# EAGLE board RadarAltimeter (EAGLE 6.3)
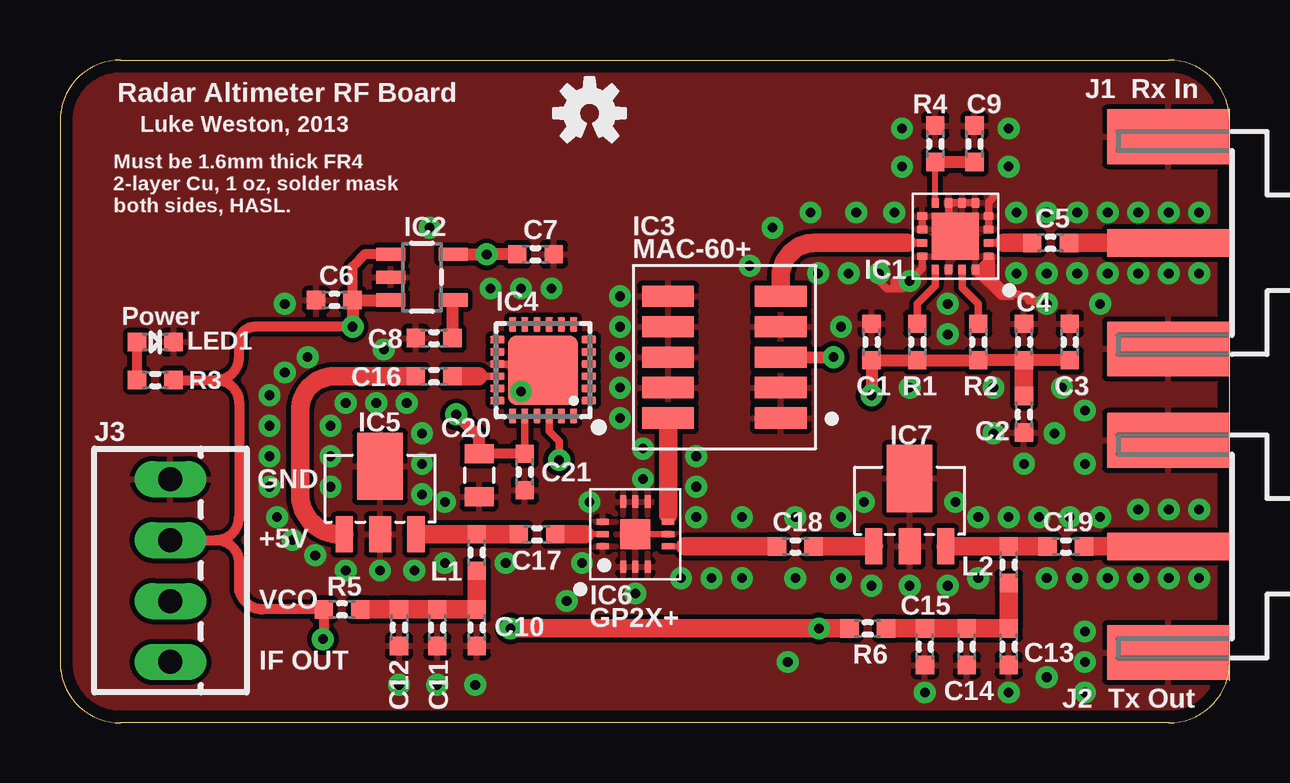
[diagram p0: board, top side]
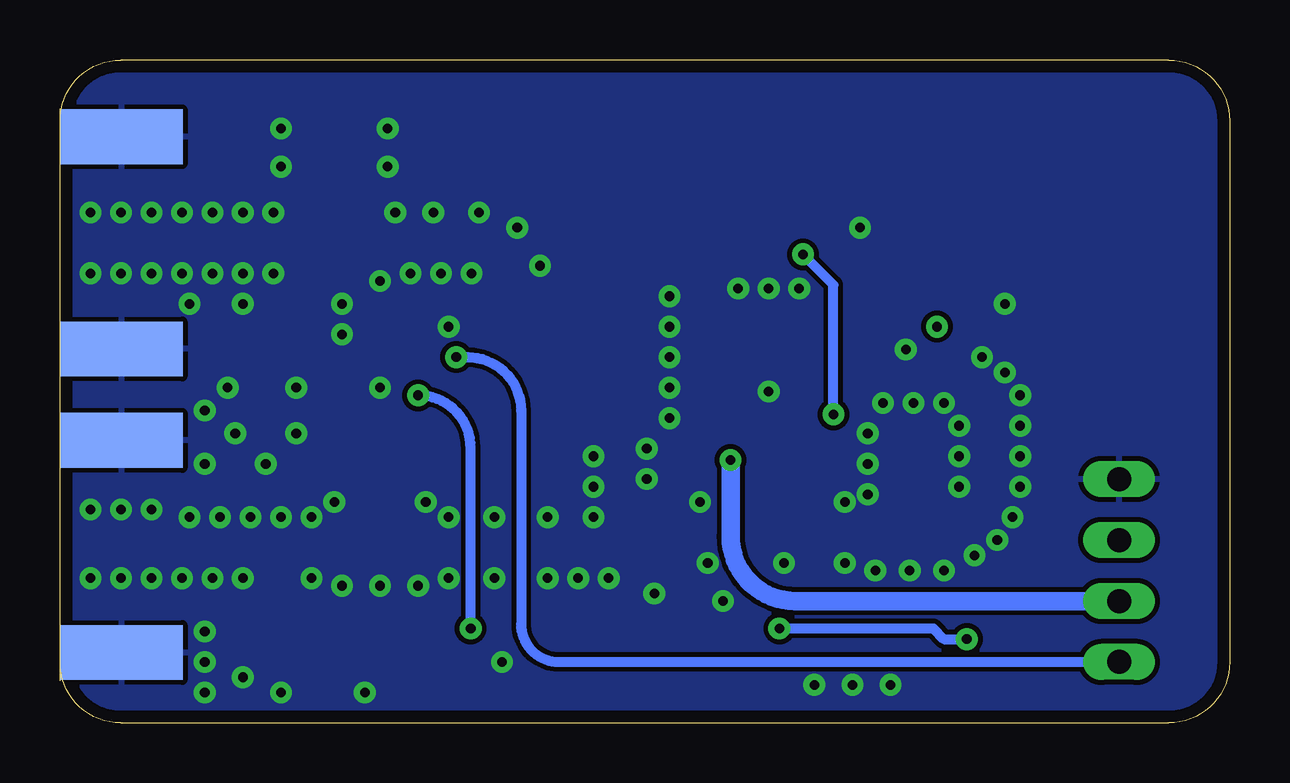
[diagram p1: board, bottom side, seen from below]

Size 48.74 x 27.62 mm. Coordinates in mm from the lower left corner, seen from the top.
Outline: 2.54,27.62 46.2,27.62 arc-90 48.74,25.08 48.74,2.54 arc-90 46.2,0 2.54,0 arc-90 0,2.54 0,25.08 arc-90 2.54,27.62
Copper layers (1*16): Top 0.035mm / dielectric 1.5mm / Bottom 0.035mm
Design rules "PCBCart-Standard *": minimum track width 8mil, minimum drill 0.4mm, track to track 8mil, track to pad 8mil, pad to pad 8mil, via to via 8mil, smd to smd 8mil, copper to edge 20mil, drill to drill 8mil, minimum pad ring 8mil, minimum via ring 10mil, stop-mask expansion 3mil, vias tented up to drill 16mil, thermal gap 8mil
Net classes: 1 vcc: width 0.254 mm

## Footprints (pad centres in the part's own frame; a part is rotated, then mirrored left to right if it is on the bottom)
0603 = smd 0.762 x 0.762: 1 -0.762,0; 2 0.762,0
0805 = smd 0.8 x 1.2: 1 -0.9,0; 2 0.9,0
16-QFN = smd 0.305 x 0.406: P$1 -0.838,-1.384; P$2 -0.279,-1.384; P$3 0.279,-1.384; P$4 0.838,-1.384; P$9 0.838,1.384; P$10 0.279,1.384; P$11 -0.279,1.384; P$12 -0.838,1.384 | smd 0.406 x 0.305: P$5 1.384,-0.838; P$6 1.384,-0.279; P$7 1.384,0.279; P$8 1.384,0.838; P$13 -1.384,0.838; P$14 -1.384,0.279; P$15 -1.384,-0.279; P$16 -1.384,-0.838 | smd 1.956 x 1.956: PAD 0,0
SOT23-5 = smd 0.55 x 1.2: 1 -0.95,-1.3; 2 0,-1.3; 3 0.95,-1.3; 4 0.95,1.3; 5 -0.95,1.3
DZ1650 = smd 0.889 x 2.159: P$1 -2.54,-2.349; P$2 -1.27,-2.349; P$3 0,-2.349; P$4 1.27,-2.349; P$5 2.54,-2.349; P$6 2.54,2.349; P$7 1.27,2.349; P$8 0,2.349; P$9 -1.27,2.349; P$10 -2.54,2.349
QFN24 = smd 0.6 x 0.3: 1 -1.905,1.27; 2 -1.905,0.762; 3 -1.905,0.254; 4 -1.905,-0.254; 5 -1.905,-0.762; 6 -1.905,-1.27; 13 1.905,-1.27; 14 1.905,-0.762; 15 1.905,-0.254; 16 1.905,0.254; 17 1.905,0.762; 18 1.905,1.27 | smd 0.3 x 0.6: 7 -1.27,-1.905; 8 -0.762,-1.905; 9 -0.254,-1.905; 10 0.254,-1.905; 11 0.762,-1.905; 12 1.27,-1.905; 19 1.27,1.905; 20 0.762,1.905; 21 0.254,1.905; 22 -0.254,1.905; 23 -0.762,1.905; 24 -1.27,1.905 | smd 2.9 x 2.9: EXP 0,0
DF782 = smd 0.711 x 1.499: 1 -1.499,0; 3 1.499,0 | smd 0.914 x 1.499: 2 0,0 | smd 1.905 x 2.794: 4 0,2.832
QFN12 = smd 0.51 x 0.25: P$1 -1.36,-0.51; P$2 -1.36,0; P$3 -1.36,0.51; P$7 1.36,0.51; P$8 1.36,0; P$9 1.36,-0.51 | smd 0.25 x 0.51: P$4 -0.51,1.36; P$5 0,1.36; P$6 0.51,1.36; P$10 0.51,-1.36; P$11 0,-1.36; P$12 -0.51,-1.36 | smd 1.24 x 1.24: PAD 0,0
J502-ND-142-0701-881/886 = smd 5.08 x 1.143: 1 2.565,0 | smd 5.08 x 2.286: G@1 2.565,4.42; G@2 2.565,-4.42 | smd 5.08 x 2.286 bottom: G@3 2.565,4.42; G@4 2.565,-4.42
22-23-2041 = drill 1 long: 1 -3.81,0; 2 -1.27,0; 3 1.27,0; 4 3.81,0
LED-0603 = smd 0.762 x 0.762: A -0.762,0; C 0.762,0

## Placement (x,y rotation side)
C1  1nF  [0603]  33.81,15.88 270 top
C2  100pF  [0603]  40.16,12.86 90 top
C3  100pF  [0603]  42.07,15.88 270 top
C4  1nF  [0603]  40.16,15.88 270 top
C5  68pF  [0603]  41.27,20 180 top
C6  2.2µF  [0603]  11.43,17.62 180 top
C7  2.2µF  [0603]  19.81,19.53 0 top
C8  470pF  [0603]  15.59,16.03 0 top
C9  10nF  [0603]  38.1,24.13 270 top
C10  22pF  [0603]  17.37,3.97 90 top
C11  1nF  [0603]  15.72,3.97 90 top
C12  1µF  [0603]  14.13,3.97 90 top
C13  22pF  [0603]  39.53,3.18 90 top
C14  1nF  [0603]  37.78,3.18 90 top
C15  1µF  [0603]  36.04,3.18 90 top
C16  68pF  [0603]  15.59,14.45 180 top
C17  68pF  [0603]  19.88,7.86 0 top
C18  68pF  [0603]  30.64,7.35 0 top
C19  68pF  [0603]  41.91,7.35 0 top
C20  4.7µF  [0805]  17.46,10.32 270 top
C21  10nF  [0603]  19.37,10.46 270 top
IC1  HMC717LP3  [16-QFN]  37.31,20.28 90 top
IC2  MIC5219  [SOT23-5]  15.08,18.57 270 top
IC3  MAC-60+  [DZ1650]  27.69,15.24 90 top
IC4  HMC431LP4  [QFN24]  20.13,14.7 180 top
IC5  GALI-84+  [DF782]  13.34,7.86 0 top
IC6  GP2X+  [QFN12]  23.97,7.86 0 top
IC7  GALI-84+  [DF782]  35.4,7.35 0 top
J1  Rx  [J502-ND-142-0701-881/886]  48.74,20 180 top
J2  Tx  [J502-ND-142-0701-881/886]  48.74,7.35 180 top
J3  Interface  [22-23-2041]  4.6,6.35 270 top
L1  22nH  [0603]  17.37,7.1 90 top
L2  22nH  [0603]  39.53,6.59 90 top
LED1  Power  [LED-0603]  3.97,15.88 0 top
R1  0Ω  [0603]  35.72,15.88 270 top
R2  0Ω  [0603]  38.26,15.88 270 top
R3  1kΩ  [0603]  3.97,14.29 0 top
R4  2.0kΩ  [0603]  36.47,24.13 270 top
R5  0Ω  [0603]  11.75,4.73 180 top
R6  0Ω  [0603]  33.65,3.94 180 top
SY  OSHW-LOGOS  [OSHW-LOGO-S]  22.07,25.4 0 top

## Library data of the parts
C1-C19 C21 R1-R6 = freetronics-master-v1; PACKAGE: 0603
C20 = freetronics-master-v1; PACKAGE: 0805; VOLTAGE: 6.3V
IC1 = freetronics-luke; PACKAGE: 16-QFN
IC2 = SparkFun; PACKAGE: SOT23-5
IC3 IC6 = freetronics-luke
IC4 = microwave; OC_FARNELL: unknown; OC_NEWARK: unknown; PACKAGE: 24-QFN
IC5 IC7 = minickts; PACKAGE: SOT-89
J1 J2 = con-coax; ID: CONSMA003.031; MF: JOHNSON COMPONENTS; MPN: 142-0701-881; OC_FARNELL: 1608603; OC_NEWARK: 08B906
J3 = con-molex; MF: MOLEX; MPN: 22-23-2041; OC_FARNELL: 1462920; OC_NEWARK: 38C0355
L1 L2 = freetronics-master-v1; ID: HK160822NJ-T; PACKAGE: 0603
LED1 = freetronics-master-v1; COLOR: Jade; PACKAGE: 0603
SY = SparkFun

## Nets
+3.0V: C7.1 C20.1 C21.1 IC2.5 IC4.20
+5V: C1.2 C2.2 C3.2 C4.2 C6.1 IC2.1 IC2.3 J3.2 R1.2 R2.2 R3.2 R5.2 R6.2
GND: C1.1 C2.1 C3.1 C4.1 C6.2 C7.2 C8.1 C9.1 C10.1 C11.1 C12.1 C13.1 C14.1 C15.1 C20.2 C21.2 IC1.P$1 IC1.P$3 IC1.P$4 IC1.P$5 IC1.P$6 IC1.P$7 IC1.P$9 IC1.P$10 IC1.P$12 IC1.P$14 IC1.P$16 IC1.PAD IC2.2 IC3.P$1 IC3.P$2 IC3.P$4 IC3.P$6 IC3.P$7 IC3.P$8 IC3.P$9 IC4.15 IC4.EXP IC5.2 IC5.4 IC6.P$1 IC6.P$3 IC6.P$4 IC6.P$5 IC6.P$6 IC6.P$8 IC6.P$10 IC6.P$11 IC6.P$12 IC6.PAD IC7.2 IC7.4 J1.G@1 J1.G@2 J1.G@3 J1.G@4 J2.G@1 J2.G@2 J2.G@3 J2.G@4 J3.1 LED1.C R4.1
N$1: C16.2 IC5.1
N$2: C17.1 IC5.3 L1.2
N$3: C10.2 C11.2 C12.2 L1.1 R5.1
N$4: C16.1 IC4.16
N$5: C17.2 IC6.P$2
N$6: IC4.22 J3.3
N$7: C18.2 IC7.1
N$8: C19.1 IC7.3 L2.2
N$9: C13.2 C14.2 C15.2 L2.1 R6.1
N$10: C19.2 J2.1
N$11: C18.1 IC6.P$9
N$12: IC3.P$10 IC6.P$7
N$13: C8.2 IC2.4
N$14: IC3.P$3 J3.4
N$15: C5.2 IC1.P$2
N$16: C5.1 J1.1
N$17: IC1.P$11 IC3.P$5
N$18: C9.2 IC1.P$8 R4.2
N$19: IC1.P$13 R1.1
N$20: IC1.P$15 R2.1
N$21: LED1.A R3.1

## Tracks (layer width: path | path; a pad name or v marks a point on that pad's centre or on a via)
+3.0V  (via drill 0.4)
  Top 0.254: C21.1 arc90 C21.1
  Top 0.305: IC2.5 | IC4.20 C21.1
  Top 0.406: C21.1 C20.1 arc90 C20.1
  Top 0.508: IC2.5 v17.78,19.53 C7.1 | C20.1 17.47,11.9 v16.51,12.86
  Bottom 0.406: v16.51,12.86 16.51,18.26 v17.78,19.53
+5V  (via drill 0.4)
  Top 0.406: IC2.1 12.7,19.52 12.19,19.02 C6.1 | 13.5,17.62 IC2.3 | v10.95,3.49 arc90 10.99,3.52 R5.2 8.45,4.73 arc-90 7.46,5.72 7.46,6.67 arc90 6.51,7.62 | J3.2 6.51,7.62 | 6.51,7.62 arc90 7.46,8.57 7.46,13.33 arc90 6.51,14.29 | R3.2 6.51,14.29 | 6.51,14.29 arc90 7.46,15.24 7.46,15.88 arc-90 8.1,16.51 v12.19,16.51
  Top 0.508: C3.2 C4.2 R2.2 R1.2 C1.2 v33.81,13.65 | IC2.3 C6.1 v12.19,16.51
  Top 0.762: C4.2 C2.2 | R6.2 v31.62,3.94 v18.76,3.94
  Bottom 0.406: v18.76,3.94 12.35,3.94 11.91,3.49 v10.95,3.49 | v31.62,3.94 31.62,11.46 arc-90 v33.81,13.65
GND  (via drill 0.4)
  Top 0.254: 38.64,18.61 38.83,18.61 38.83,19.43 38.7,19.43 IC1.P$1 | 38.64,18.8 38.64,19.24 | 38.64,19.3 38.64,19.24 | 38.64,19.24 38.32,18.92 38.39,18.92 38.58,18.73 | IC6.P$8 IC6.PAD | 38.64,18.8 38.7,18.86 38.7,19.37 38.27,18.94 IC1.P$16 | 38.64,18.8 38.58,18.48 38.2,18.86
  Top 0.305: 38.89,21.91 38.69,21.7 IC1.P$4 IC1.P$3 | IC1.P$5 IC1.P$6 IC1.P$7 37.03,20.99 36.99,20.95 36.99,20.64 IC1.PAD | IC1.P$9 IC1.P$10 35.92,21.07 | IC1.P$12 35.92,18.94 v35.4,18.41 | v35.4,18.41 35.08,18.1 | 35.08,18.1 35.08,18.41 | 35.08,18.41 34.77,18.41 34.77,18.1 | 34.13,18.41 34.45,18.1 34.77,18.1 | 35.08,18.1 34.77,18.1 | 35.08,18.41 v35.4,18.41 | 39.21,18.1 v41.12,17.46 40.35,17.59 | 38.14,18.85 39.21,17.78 39.59,17.78 | 39.66,17.78 39.59,17.78 | 39.59,17.78 38.64,18.73 | 38.64,18.73 38.58,18.73 | 38.32,18.73 38.32,18.8 38.58,18.8 38.64,18.73 | IC4.15 18.86,14.95 19.21,14.6 | v19.21,13.81 19.69,13.81 20.13,14.25 IC4.EXP
  other vias: 46.2,8.89 8.73,12.38 11.27,12.38 13.34,6.35 43.34,8.57 9.68,7.62 11.91,6.35 11.27,11.11 9.37,17.46 14.45,13.33 13.49,15.56 16.03,9.21 8.73,13.65 39.53,8.57 23.34,13.97 8.73,9.84 21.75,6.67 9.37,14.6 23.97,5.4 15.08,12.06 40.8,8.57 35.4,5.72 11.91,13.33 42.39,6.03 36.04,1.27 26.51,8.57 10.32,15.24 23.34,15.24 24.29,10.16 26.51,11.11 37.31,9.21 26.51,9.84 8.73,11.11 32.54,6.03 46.2,6.03 25.88,6.03 39.53,1.27 14.76,6.35 15.72,1.59 22.07,9.21 24.29,11.43 18.57,6.67 23.34,12.7 9.05,8.57 17.3,1.59 23.34,17.78 28.42,6.03 38.26,8.57 36.99,5.72 33.81,5.72 42.07,8.57 43.66,6.03 38.26,6.03 10.64,6.99 43.34,17.46 40.16,10.79 23.34,16.51 35.08,24.77 39.53,24.77 44.93,8.89 33.5,9.21 41.12,6.03 15.08,9.52 47.47,6.03 16.03,6.67 30.64,6.03 47.47,8.89 13.18,13.33 31.59,18.73 27.15,6.03 44.93,6.03 32.54,8.57 15.08,10.79 11.27,9.84 14.13,1.59 30.64,8.57 28.42,8.57 17.94,18.1 15.4,20.64 30.32,2.54 35.4,13.97 36.99,16.19 36.99,17.46 28.73,19.05 29.69,20.64 32.86,18.73 34.13,18.73 38.89,13.97 32.54,16.51 39.85,18.73 42.39,18.73 41.12,18.73 43.66,18.73 41.75,13.97 42.7,13.02 41.43,12.06 38.89,12.06 42.7,10.79 34.77,21.27 33.18,21.27 31.27,21.27 42.39,21.27 41.12,21.27 39.85,21.27 43.66,21.27 44.93,21.27 44.93,18.73 35.08,23.18 39.53,23.18 46.2,21.27 47.47,21.27 46.2,18.73 47.47,18.73 42.7,1.27 41.12,1.9 42.7,2.54 42.7,3.81 21.11,5.08 20.48,18.1 19.21,18.1
  pour Top (isolate 0.203): -0.64,28.57 50.01,28.57 50.01,-0.95 -0.64,-0.95
  pour Bottom (isolate 0.203): -0.64,28.57 50.01,28.57 50.01,-0.95 -0.64,-0.95
N$1
  Top 0.762: C16.2 11.43,14.45 arc90 10,13.02 10,9.52 arc90 11.67,7.86 IC5.1
N$2
  Top 0.762: C17.1 L1.2 IC5.3
N$3
  Top 0.762: L1.1 C10.2 C11.2 C12.2 R5.1
N$4
  Top 0.305: IC4.16 17.43,14.45
  Top 0.762: 17.43,14.45 C16.1
N$5
  Top 0.254: IC6.P$2 21.86,7.86
  Top 0.762: 21.86,7.86 21.75,7.86 C17.2
N$6  (via drill 0.4)
  Top 0.305: IC4.22 20.38,12.16 20.8,11.75 v20.8,10.95
  Bottom 0.762: J3.3 18.1,5.08 arc90 20.8,7.78 v20.8,10.95
N$7
  Top 0.762: IC7.1 C18.2
N$8
  Top 0.762: C19.1 L2.2 IC7.3
N$9
  Top 0.762: R6.1 C15.2 C14.2 C13.2 L2.1
N$10
  Top 0.762: J2.1 C19.2
N$11
  Top 0.254: IC6.P$9 26.05,7.35
  Top 0.762: 26.05,7.35 C18.1
N$12
  Top 0.254: 25.34,8.67 IC6.P$7
  Top 0.762: IC3.P$10 25.34,8.67
N$13
  Top 0.406: 16.35,17.59 IC2.4
  Top 0.508: 16.35,17.59 C8.2
N$14  (via drill 0.4)
  Top 0.508: IC3.P$3 v32.23,15.24
  Bottom 0.406: J3.4 27.94,2.54 arc90 29.53,4.13 29.53,13.02 arc-90 31.75,15.24 v32.23,15.24
N$15
  Top 0.305: IC1.P$2 39.34,20
  Top 0.762: 39.34,20 C5.2
N$16
  Top 0.762: C5.1 J1.1
N$17
  Top 0.305: IC1.P$11 35.27,20
  Top 0.762: 30,17.81 arc90 IC3.P$5 30.04,18.61 arc-90 31.43,20 35.27,20
N$18
  Top 0.254: IC1.P$8 R4.2
  Top 0.508: C9.2 R4.2
N$19
  Top 0.305: IC1.P$13 36.47,18.21 35.72,17.46 R1.1
N$20
  Top 0.305: IC1.P$15 37.59,18.14 38.26,17.46 R2.1
N$21
  Top 0.406: LED1.A R3.1

## Text on the board
tPlace: Radar Altimeter RF Board | Rx In | Luke Weston, 2013 | Must be 1.6mm thick FR4 / 2-layer Cu, 1 oz, solder mask / both sides, HASL. | MAC-60+ | Power | GND | +5V | VCO | GP2X+ | IF OUT | Tx Out